# Altium PCB ESP-12S.PcbDoc
Units mil, origin at the board's own origin, x right, y up, seen from the top; angles counter-clockwise.
Board outline 1040.03 x 1195.03 mil, 2 copper layers (Top Layer, Bottom Layer); 7 components, 6 nets, 30 pads, 6 vias.
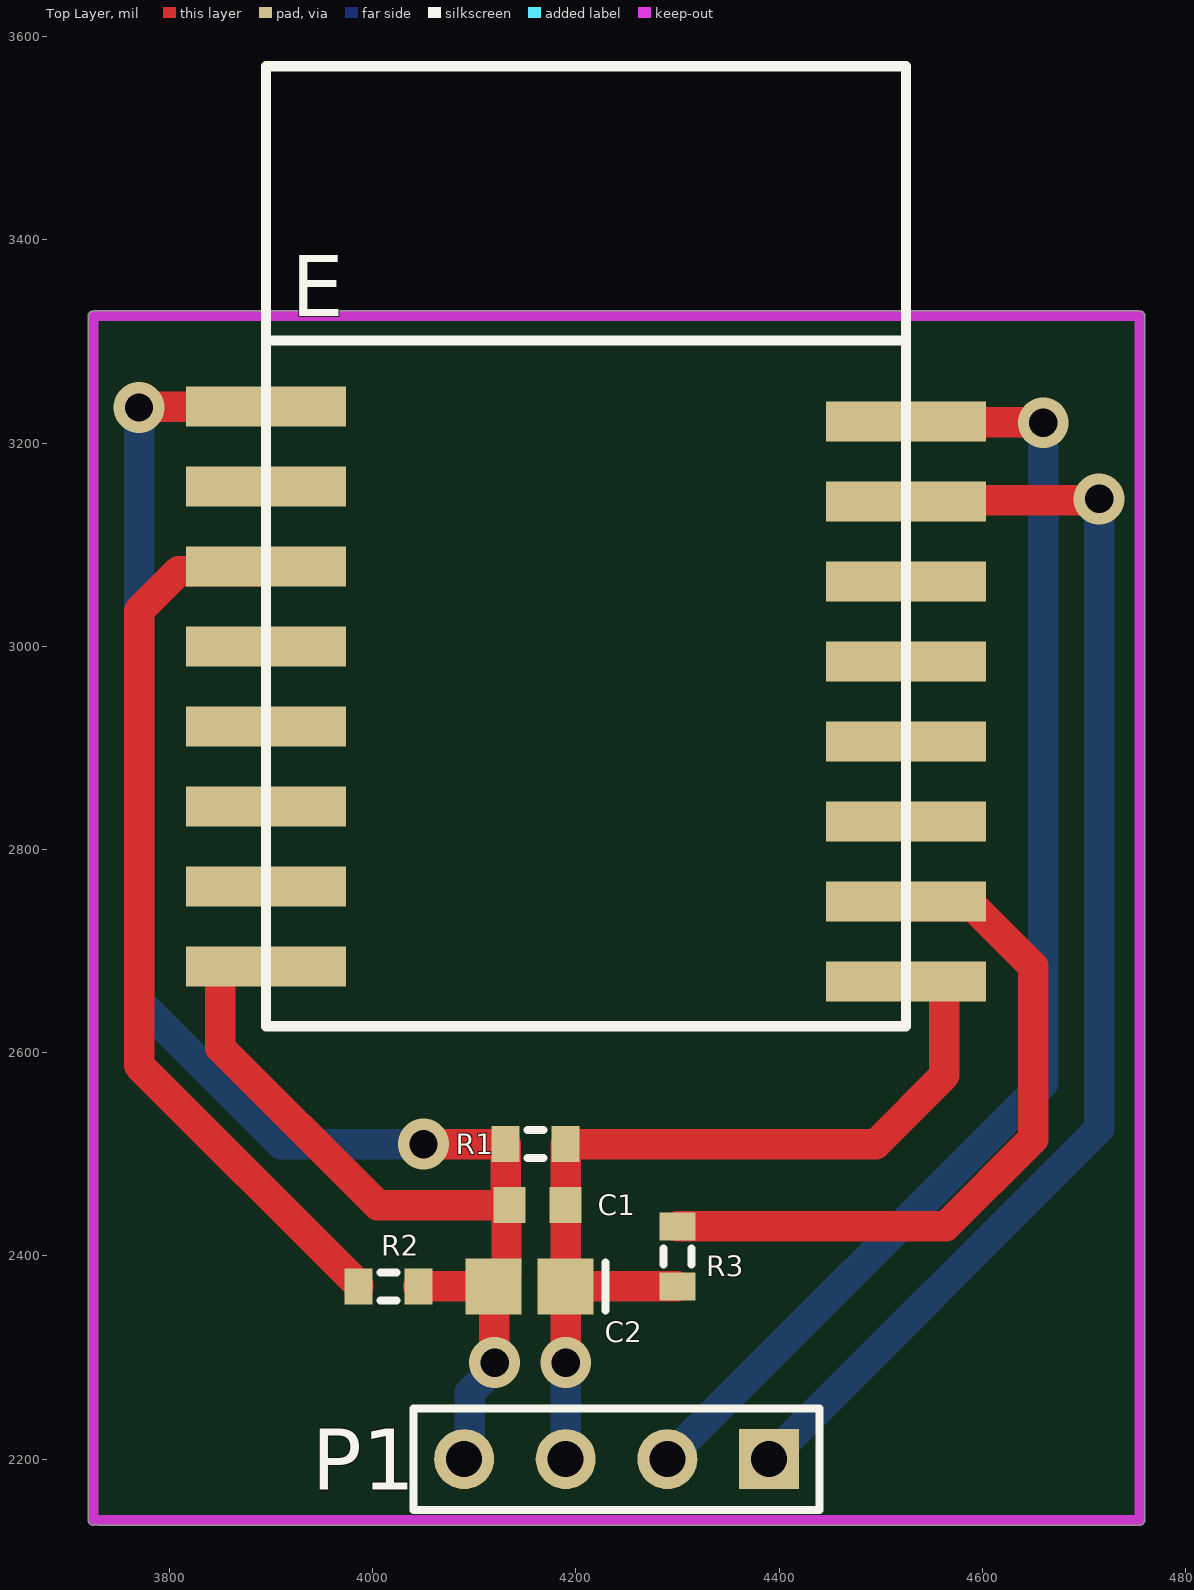
[diagram p0: Top Layer view]
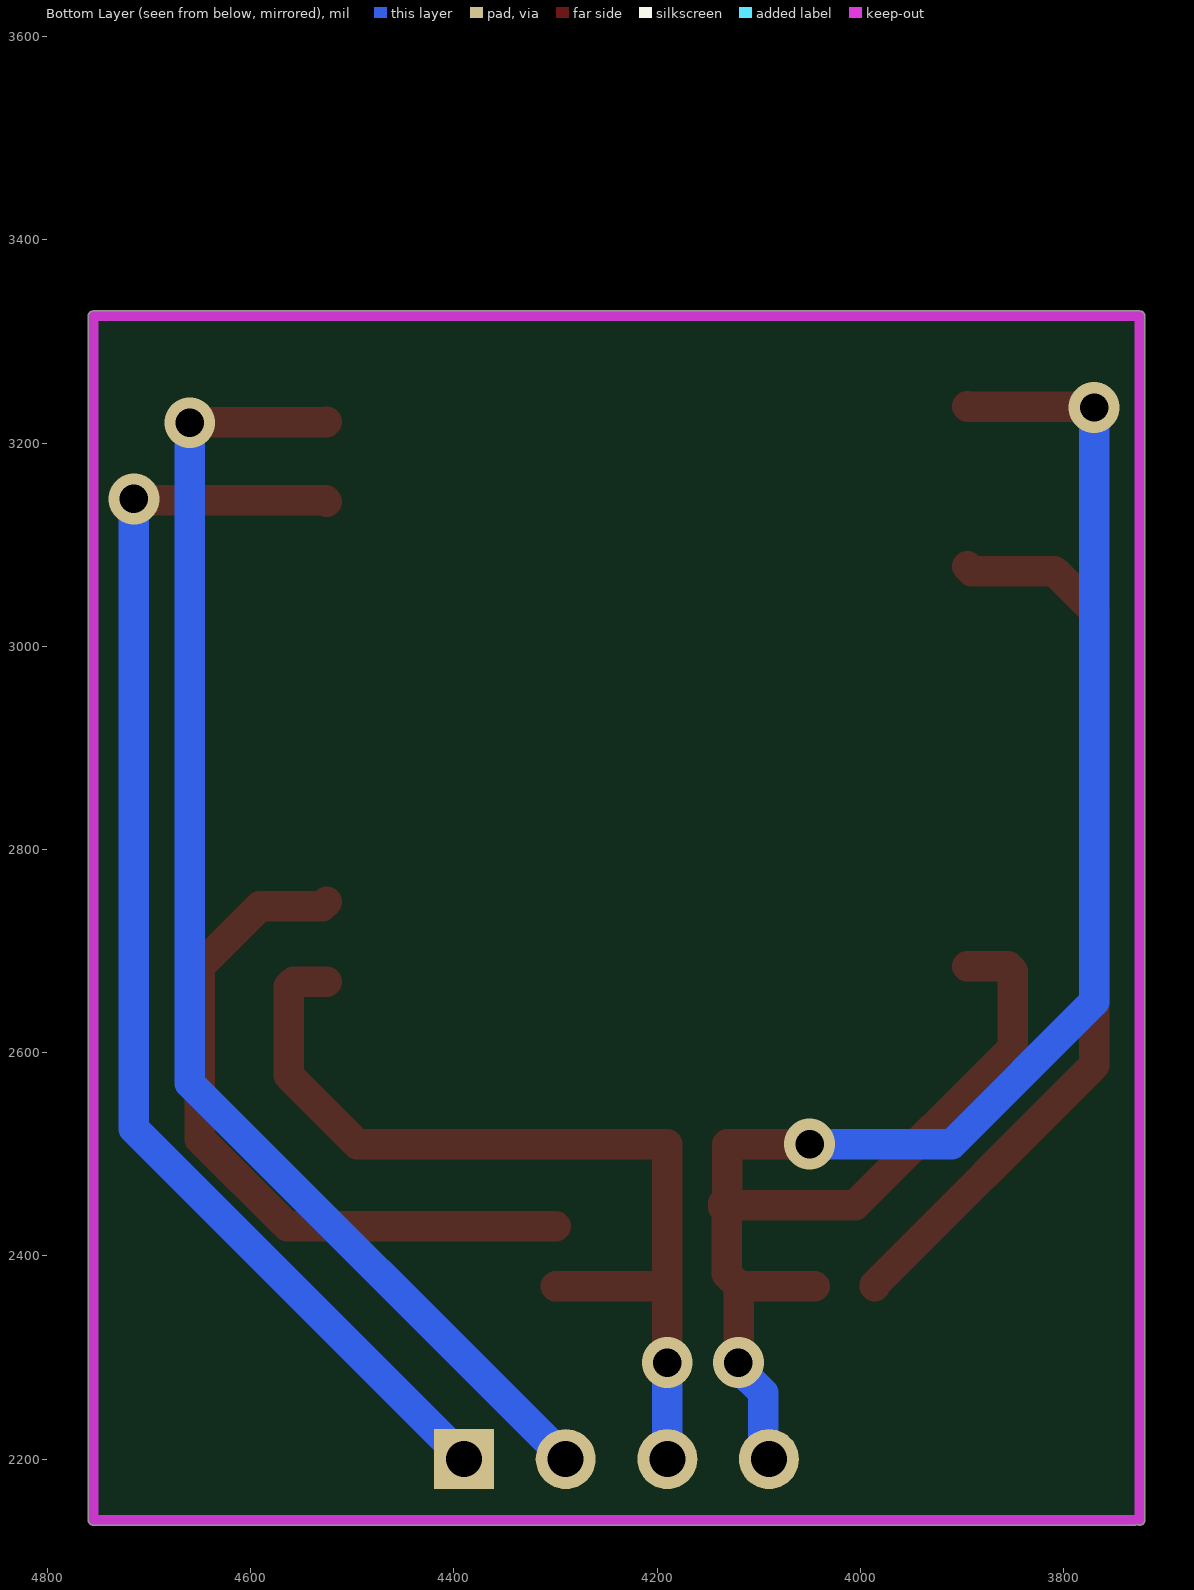
[diagram p1: Bottom Layer view, seen from below]

## Layer stack, top to bottom
Top Solder: solder mask 0.4, Solder Resist, Dk 3.5
Top Layer: signal copper 1.4
Dielectric 1: dielectric 12.6, FR-4, Dk 4.8
Bottom Layer: signal copper 1.4
Bottom Solder: solder mask 0.4, Solder Resist, Dk 3.5

## Board outline
3719.99,2140 3719.99,3325 cw(c3725,3325) 3725,3330.01 4755,3330.01 cw(c4755,3325) 4760.02,3325 4760.02,2140 cw(c4755,2140) 4755,2134.99 3730,2134.99 cw(c3730,2140) 3727.5,2135.65 cw(c3725,2140)

## Design rules (kind name [scope] priority, off if disabled: settings)
Clearance [All] p1: gap=10 ignorepadtopadclearanceinfootprint=FALSE except(0: Arc-Hole Track-Hole SMDPad-Hole THPad-Hole Via-Hole Fill-Hole Poly-Hole Region-Hole Text-Hole)
PolygonConnect [All] p1: connectstyle=Relief reliefconductorwidth=10 reliefentries=4 polygonreliefangle="90 Angle" airgapwidth=10
RoutingVias [All] p1: holewidth=28 width=50 viastyle="Through Hole" minholewidth=28 minwidth=50 maxholewidth=28 maxwidth=50
SolderMaskExpansion [All] p1: expansion=4 istentingtop=FALSE
Width [All] p1: maxlimit=30 minlimit=10 preferedwidth=30 minimp=50.000000 maximp=50.000000 favimp=50.000000
30 further rules are at their usual default settings.

## Classes and differential pairs
component class ESP-12S: C2 E P1 R1 R2 R3

## Components (designator, comment, footprint, x,y, rotation, side; value= is the part's Value field where it differs from the comment)
C1 "Cap Semi" 1608[0603] 4162.44,2450 r180 top value=0.1uF
C2 "Cap Semi" C2512 4154.57,2370 r180 top value=10uF
E "ESP-12S" ESP-12S 3895,2625.94 r0 top
P1 "Header 4" HDR1X4 4390,2200 r180 top
R1 "Res3" J1-0603 4160.47,2510 r0 top value=200
R2 "Res3" J1-0603 4015.47,2370 r0 top value=1k
R3 "Res3" J1-0603 4300,2399.53 r90 top value=1k

## Footprints (in the part's own frame and the unit in brackets; to place one, negate y for a bottom-side part, rotate by r counter-clockwise, add the part's x,y. Pads: shape width x height; smd on the part's side, far side on the other; paste and mask are expansions set on the pad)
1608[0603] [mm] "Chip Capacitor, Body 1.6x0.8mm, IPC High Density"
  rect 0.8x0.9 smd: 1(-0.7,0) 2(0.7,0)
  body extent -0.87,-0.48 0.87,0.48, height 1.3
C2512 [mm] "Chip Capacitor, Body 2.54x1.27mm, IPC High Density"
  rect 1.4x1.4 smd: 1(-0.9,0) 2(0.9,0)
  silkscreen extent -1.9,-0.6 -1.9,0.6, body extent -1.45,-0.82 1.45,0.82, height 1.3
ESP-12S [mm]
  rect 4x1 smd: 1(0,15.5) 2(0,13.5) 3(0,11.5) 4(0,9.5) 5(0,7.5) 6(0,5.5) 7(0,3.5) 8(0,1.5) 9(16.002,1.119) 10(16.002,3.119) 11(16.002,5.119) 12(16.002,7.119) 13(16.002,9.119) 14(16.002,11.119) 15(16.002,13.119) 16(16.002,15.119)
  silkscreen extent 0,0 16,24
HDR1X4 [mm] "Connector; Header; 4 Position"
  rect 1.5x1.5 hole 0.9: 1(0,0)
  round 1.5 hole 0.9: 2(2.54,0) 3(5.08,0) 4(7.62,0)
  silkscreen extent -1.27,-1.27 8.89,1.27
J1-0603 [mm] "Chip Resistor, Body 1.6x0.8mm, IPC High Density"
  rect 0.7x0.9 smd: 1(-0.75,0) 2(0.75,0)
  silkscreen extent -0.2,-0.35 0.2,0.35, body extent -0.85,-0.48 0.85,0.48, height 0.9

## Part data
C1 C2: "Capacitor (Semiconductor SIM Model)", LatestRevisionDate=29-May-2009, LatestRevisionNote="IPC-7351 Footprint Added.", PackageDescription="Chip Capacitor", PackageReference=C1206, Published=8-Jun-2000, Publisher="Altium Limited"
P1: "Header, 4-Pin", LatestRevisionDate=17-Jul-2002, LatestRevisionNote="Re-released for DXP Platform.", Publisher="Altium Limited"
R1 R2 R3: "Resistor", LatestRevisionDate=29-May-2009, LatestRevisionNote="IPC-7351 Footprint Added.", PackageDescription="Chip Resistor", PackageReference=J1-0603, Published=8-Jun-2000, Publisher="Altium Limited"

## Via types
v1: diameter 50, hole 28, Top Layer to Bottom Layer, 6 vias

## Nets (pads, with @x,y where several pads share a name; then routed paths per layer and width w, separated by ;. In a path a pad name is that pad's centre, name@x,y a point inside that pad or via, vN(x,y) a via of type N, cw(c..) or ccw(c..) an arc to the next point about the centre after c; other vN are vias at no path point)
3.3V: C1.2 C2.2 E.1 E.8 P1.4 R1.1 R2.2 | length 2003.1
  Top Layer w30: v1(3770,3235) 3770.59,3235.59 3894.41,3235.59 E.1 ; E.8 3854.69,2685 3850,2680.31 3850,2605 4005,2450 C1.2 ; R2.2 C2.2 ; v1(4050,2510) R1.1 ; v1(4120,2295) 4119.57,2295.43 4119.57,2369.57 C2.2 ; R1.1@4130.94,2507.28 4130.94,2455.91 4134.88,2451.97 C1.2 ; C2.2 4131.69,2382.56 4131.69,2444.84 4134.88,2448.03 C1.2
  Bottom Layer w30: v1(3770,3235) 3770,2650 3910,2510 v1(4050,2510) ; P1.4 4095.56,2205.56 4095.56,2265.15 4120,2289.59 v1(4120,2295)
GND: C1.1 C2.1 E.9 P1.3 R1.2 R3.1 | length 947.8
  Top Layer w30: v1(4190,2295) C2.1 ; R3.1 C2.1 ; E.9 4557.89,2670 4562.57,2665.31 4562.57,2577.57 4495,2510 R1.2 C1.1 C2.1
  Bottom Layer w30: P1.3 v1(4190,2295)
NetE_3: E.3 R2.1 | length 897.5
  Top Layer w30: E.3 3890.31,3074.02 3809.02,3074.02 3770,3035 3770,2587.44 3985.94,2371.5 R2.1
NetE_10: E.10 R3.2 | length 707
  Top Layer w30: R3.2 4564.06,2429.06 4650,2515 4650,2685 4590.94,2744.06 4529.69,2744.06 E.10
RX: E.15 P1.1 | length 1270.7
  Top Layer w30: E.15 4526.28,3143.72 4713.72,3143.72 v1(4715,3145)
  Bottom Layer w30: P1.1 4715,2525 v1(4715,3145)
TX: E.16 P1.2 | length 1308.7
  Top Layer w30: E.16 4525.59,3220.59 4659.41,3220.59 v1(4660,3220)
  Bottom Layer w30: P1.2 4660,2570 v1(4660,3220)
pads on no net: E.2 E.4 E.5 E.6 E.7 E.11 E.12 E.13 E.14

## Keep-outs
Keep-Out Layer:
  lines w10: 3725,2140 3725,3275 3725,3325 4755,3325 4755,2140 3730,2140